# EAGLE board pcb (EAGLE 8.2.1)

Size 100 x 80 mm. Coordinates in mm from the lower left corner, seen from the top.
Outline: 0,0 100,0 100,80 0,80 0,0
Copper layers (1*16): Top 0.035mm / dielectric 1.5mm / Bottom 0.035mm
Design rules "default": minimum track width 6mil, minimum drill 0.35mm, track to track 6mil, track to pad 6mil, pad to pad 6mil, via to via 6mil, smd to smd 6mil, copper to edge 40mil, drill to drill 6mil, minimum pad ring 10mil, minimum via ring 8mil, stop-mask expansion 4mil, vias tented up to drill 0mil, thermal gap 10mil

## Footprints (pad centres in the part's own frame; a part is rotated, then mirrored left to right if it is on the bottom)
FEMHEADER = drill 0.6: 1 -83.82,-7.62; 2 -83.82,-5.08; 3 -83.82,-2.54; 4 -83.82,0; 5 -83.82,2.54; 6 -83.82,5.08; 7 -83.82,7.62; 8 -83.82,10.16; 9 -83.82,12.7; 10 -83.82,15.24; 11 -83.82,17.78; 12 -83.82,20.32; 13 -83.82,22.86; 14 -83.82,25.4; 15 -83.82,27.94; 16 -83.82,30.48; 17 -71.12,33.02; 18 -68.58,33.02; 19 -66.04,33.02; 20 -63.5,33.02; 21 -60.96,33.02; 22 -58.42,33.02; 23 -55.88,33.02; 24 -53.34,33.02; 25 -50.8,33.02; 26 -48.26,33.02; 27 -45.72,33.02; 28 -43.18,33.02; 29 -40.64,33.02; 30 -38.1,33.02; 31 -35.56,33.02; 32 -33.02,33.02; 33 -30.48,33.02; 34 -27.94,33.02; 35 -25.4,33.02; 36 -22.86,33.02; 37 -20.32,33.02; 38 -17.78,33.02; 39 -15.24,33.02; 40 -12.7,33.02; 41 -10.16,33.02; 42 -7.62,33.02; 43 -5.08,33.02; 44 -2.54,33.02; 45 0,33.02; 46 2.54,33.02; 47 5.08,33.02; 48 7.62,33.02; 49 10.16,33.02; 50 12.7,33.02; 51 15.24,33.02; 52 17.78,33.02; 53 20.32,33.02; 54 22.86,33.02; 55 25.4,33.02; 57 33.02,30.48; 58 33.02,27.94; 59 33.02,25.4; 60 33.02,22.86; 61 33.02,20.32; 62 33.02,17.78; 63 33.02,15.24; 64 33.02,12.7; 65 33.02,10.16; 66 33.02,7.62; 67 33.02,5.08; 68 33.02,2.54; 69 33.02,0; 70 33.02,-2.54; 71 33.02,-5.08; 72 33.02,-7.62; 73 33.02,-10.16; 74 33.02,-12.7; P1 -81.28,-7.62; P2 -81.28,-5.08; P3 -81.28,-2.54; P4 -81.28,0; P5 -81.28,2.54; P6 -81.28,5.08; P7 -81.28,7.62; P8 -81.28,10.16; P9 -81.28,12.7; P10 -81.28,15.24; P11 -81.28,17.78; P12 -81.28,20.32; P13 -81.28,22.86; P14 -81.28,25.4; P15 -81.28,27.94; P16 -81.28,30.48; P17 -71.12,30.48; P18 -68.58,30.48; P19 -66.04,30.48; P20 -63.5,30.48; P21 -60.96,30.48; P22 -58.42,30.48; P23 -55.88,30.48; P24 -53.34,30.48; P25 -50.8,30.48; P26 -48.26,30.48; P27 -45.72,30.48; P28 -43.18,30.48; P29 -40.64,30.48; P30 -38.1,30.48; P31 -35.56,30.48; P32 -33.02,30.48; P33 -30.48,30.48; P34 -27.94,30.48; P35 -25.4,30.48; P36 -22.86,30.48; P37 -20.32,30.48; P38 -17.78,30.48; P39 -15.24,30.48; P40 -12.7,30.48; P41 -10.16,30.48; P42 -7.62,30.48; P43 -5.08,30.48; P44 -2.54,30.48; P45 0,30.48; P46 2.54,30.48; P47 5.08,30.48; P48 7.62,30.48; P49 10.16,30.48; P50 12.7,30.48; P51 15.24,30.48; P52 17.78,30.48; P53 20.32,30.48; P54 22.86,30.48; P55 25.4,30.48; P57 30.48,30.48; P58 30.48,27.94; P59 30.48,25.4; P60 30.48,22.86; P61 30.48,20.32; P62 30.48,17.78; P63 30.48,15.24; P64 30.48,12.7; P65 30.48,10.16; P66 30.48,7.62; P67 30.48,5.08; P68 30.48,2.54; P69 30.48,0; P70 30.48,-2.54; P71 30.48,-5.08; P72 30.48,-7.62; P73 30.48,-10.16; P74 30.48,-12.7

## Placement (x,y rotation side)
U$1  [FEMHEADER]  -49.53,16.51 0 top  (outside the outline)

## Library data of the parts
U$1 = fem_header